# Altium PCB Sync_Buck_DC-DC_24V_PCB.PcbDoc
Units mil, origin at the board's own origin, x right, y up, seen from the top; angles counter-clockwise.
Board outline 2800 x 2100 mil, 4 copper layers (Top Layer, GND, PWR, Bottom Layer), stack 23.712 mil thick; 47 components, 25 nets, 124 pads, 41 vias.
Unrouted connection lines stored in the file: 1.
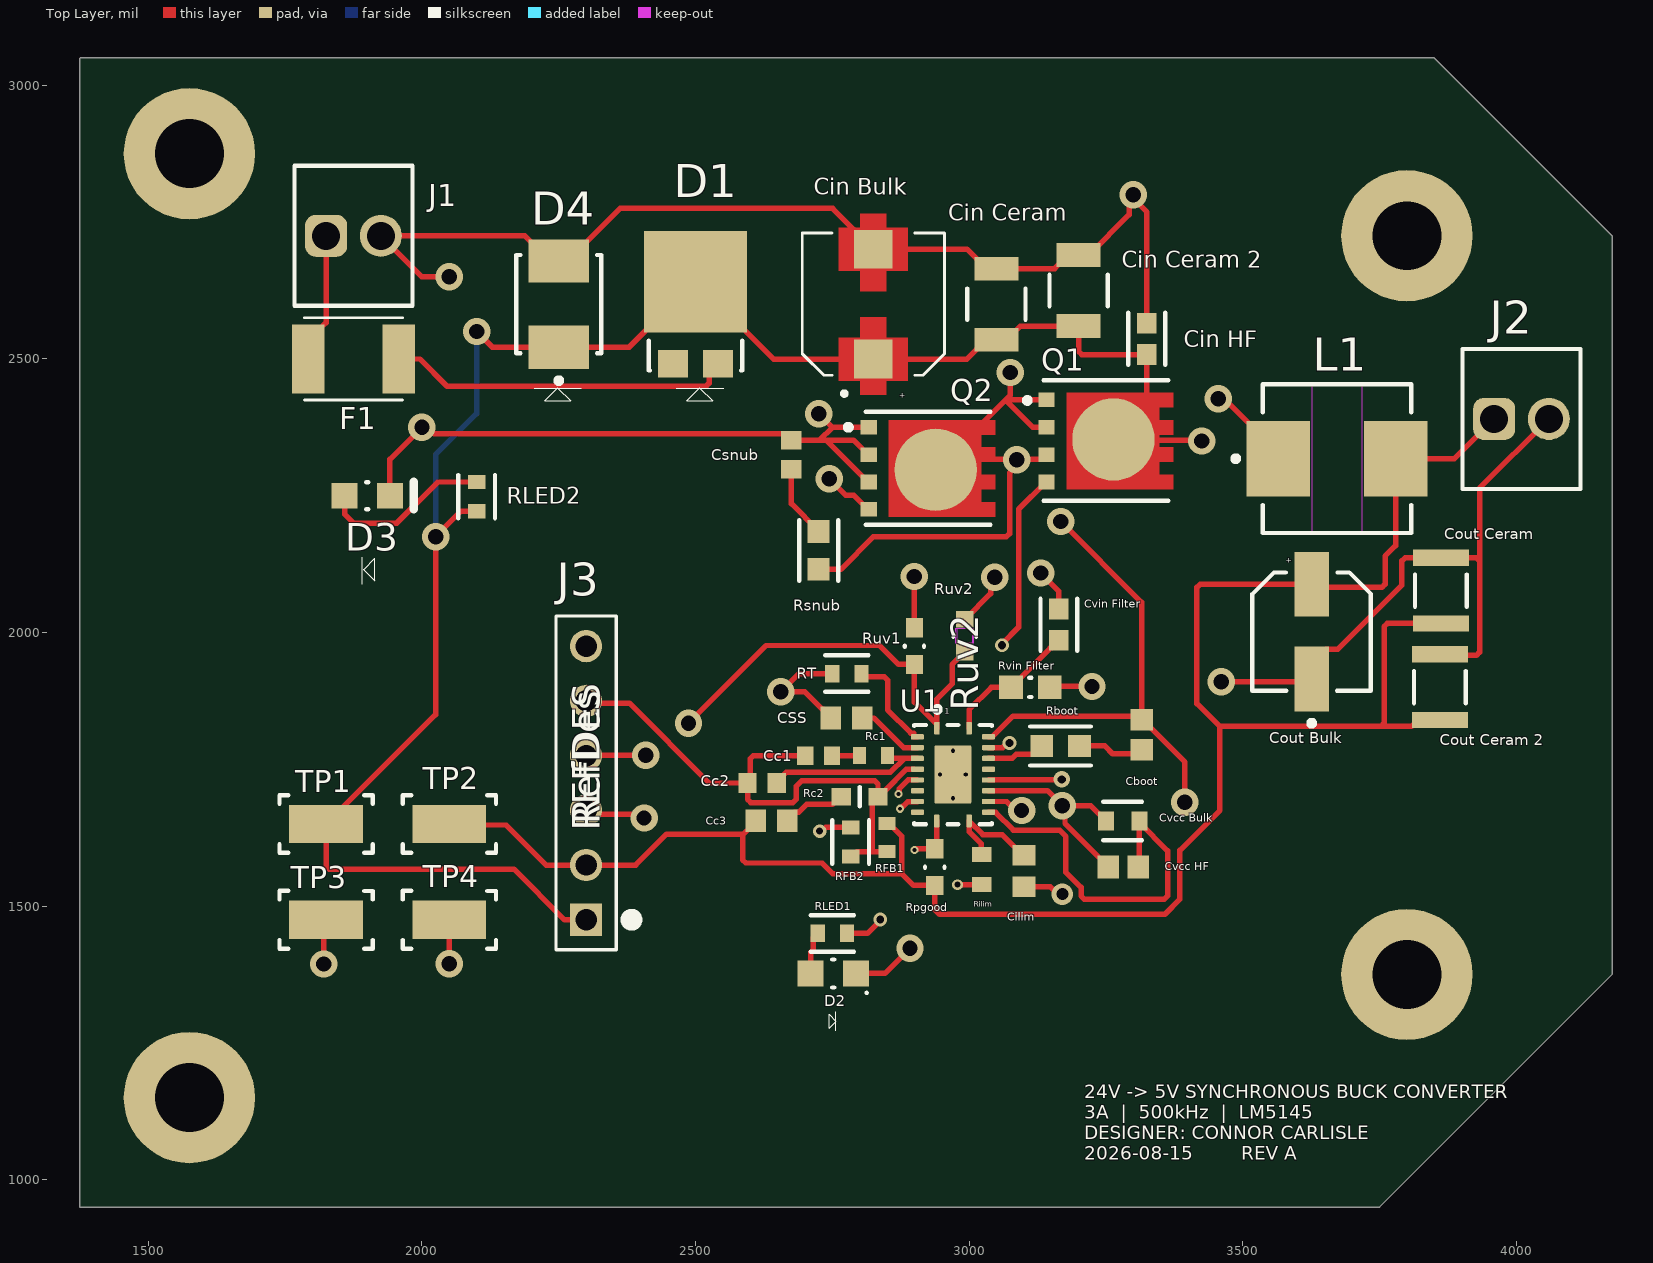
[diagram p0: Top Layer view]
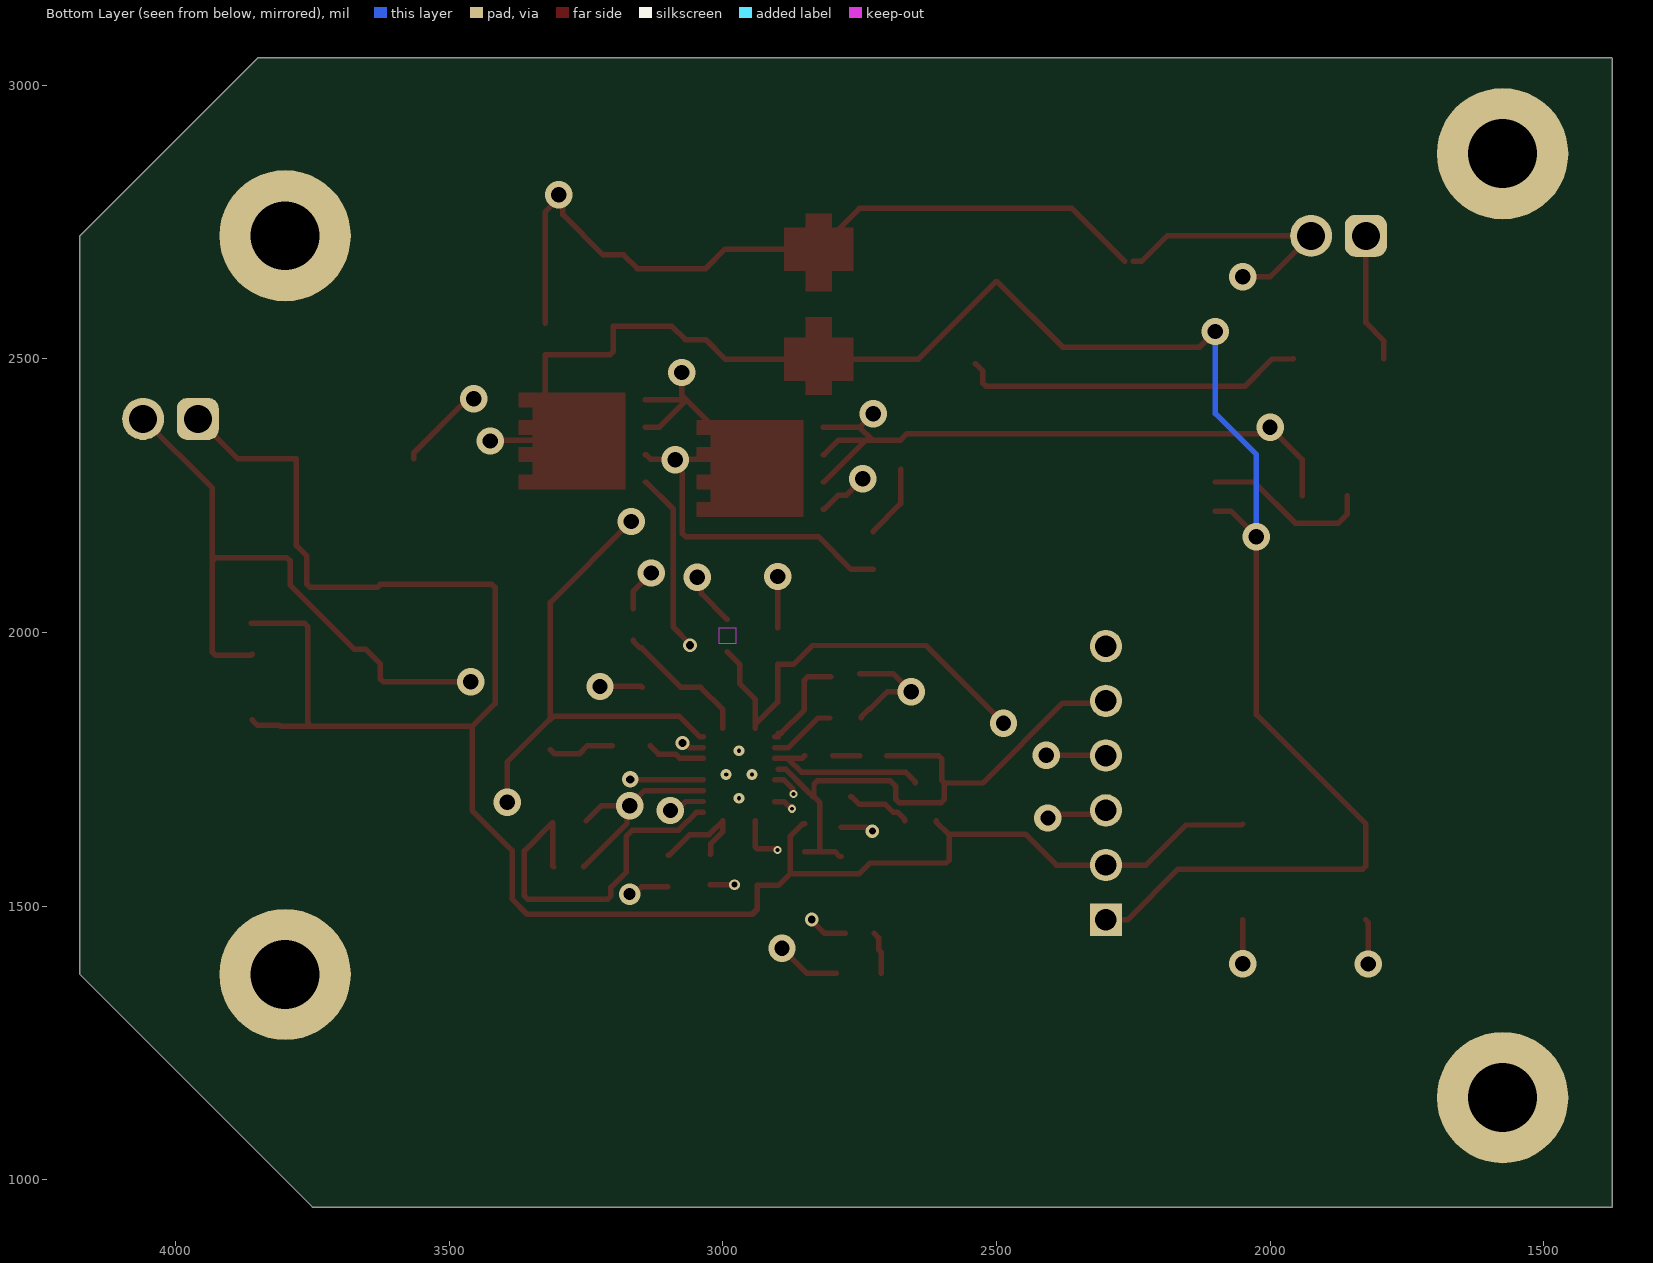
[diagram p1: Bottom Layer view, seen from below]
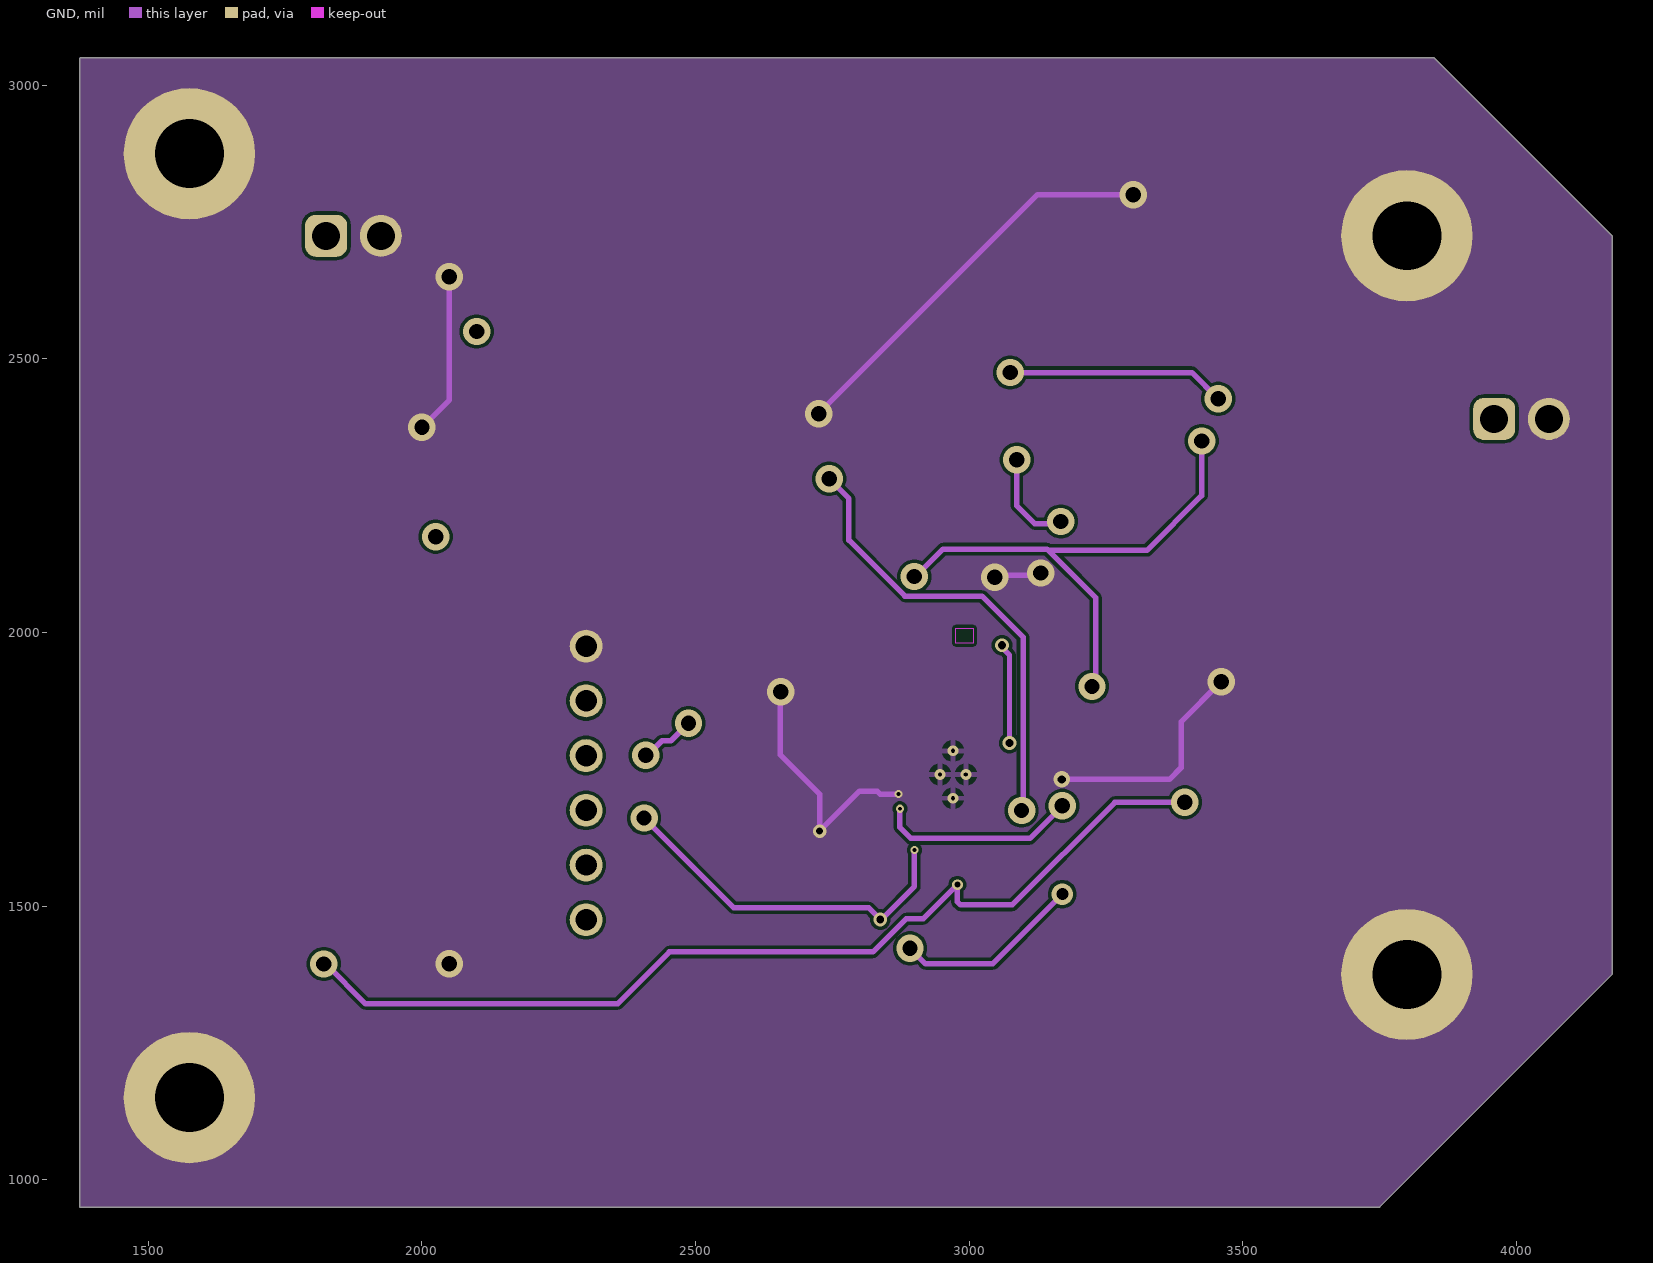
[diagram p2: GND]
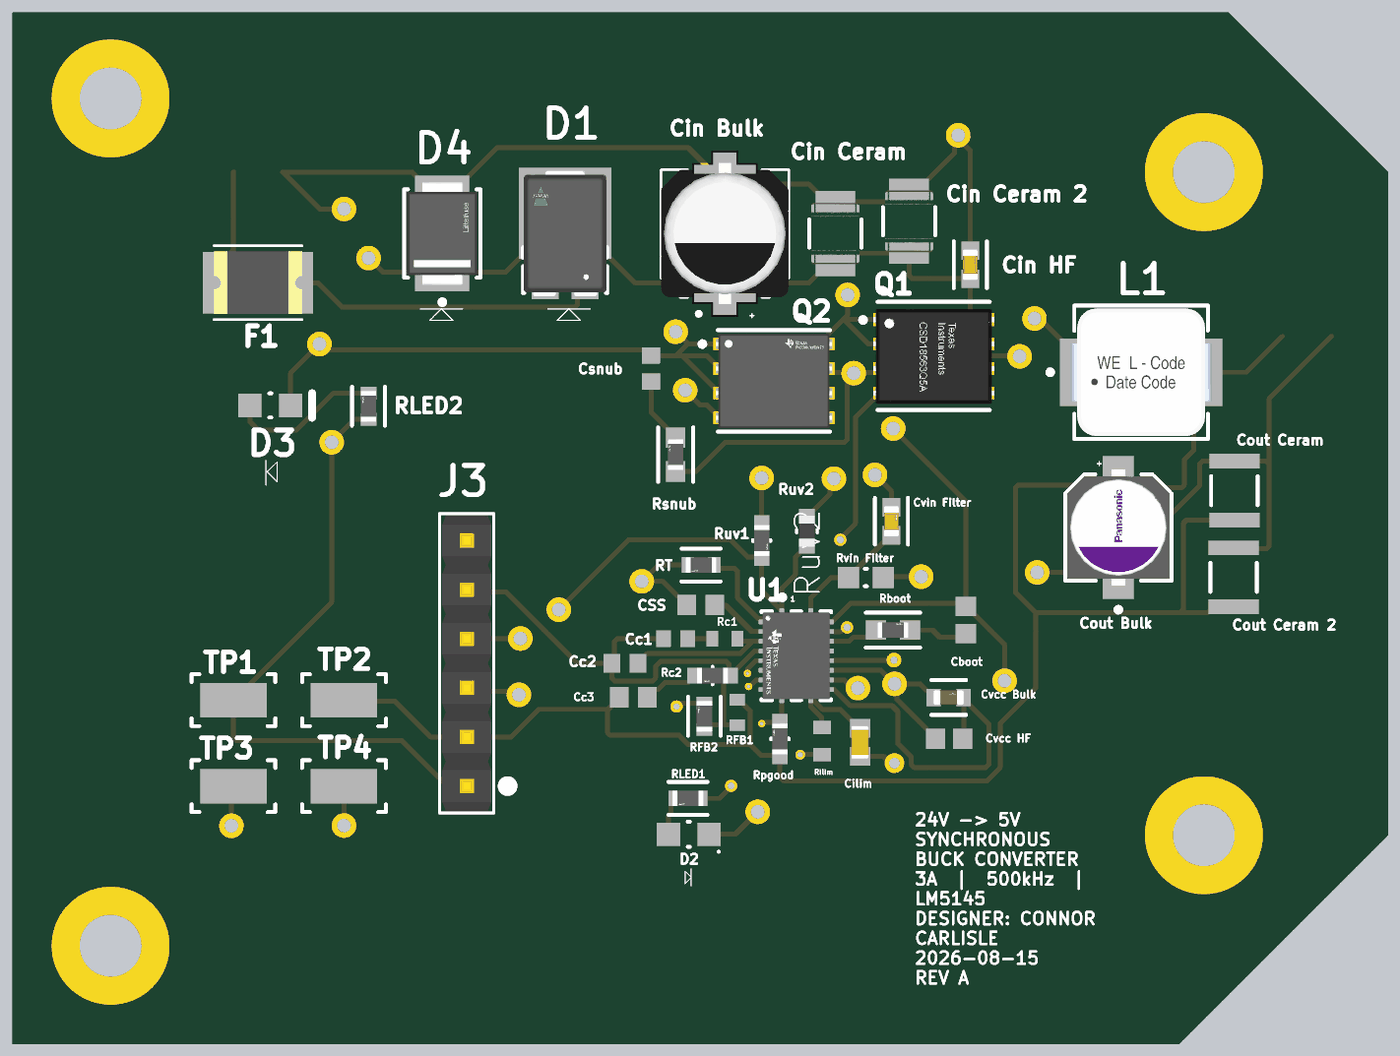
[diagram p3: 3D render of the assembled board from above, using the file's embedded part models]

## Layer stack, top to bottom
Top Solder: solder mask 0.4, Solder Resist, Dk 3.5
Top Layer: signal copper 1.378
Dielectric 1: prepreg 2.8, PP-006, Dk 4.1
GND: signal copper 1.378
Dielectric 2: dielectric 12.6, FR-4, Dk 4.8
PWR: signal copper 1.378
Dielectric 3: prepreg 2.8, PP-006, Dk 4.1
Bottom Layer: signal copper 1.378
Bottom Solder: solder mask 0.4, Solder Resist, Dk 3.5

## Board outline
1375,950 1375,3049.41 1375.59,3050 3850,3050 4175,2725 4175,1375 3750,950

## Design rules (kind name [scope] priority, off if disabled: settings)
Clearance [All] p1: gap=5.91 ignorepadtopadclearanceinfootprint=FALSE
MinimumSolderMaskSliver [All] p1: minsoldermaskwidth=4
PlaneConnect [All] p1: planeconnectstyle=Direct reliefexpansion=20 reliefentries=4 reliefconductorwidth=10 reliefairgap=10
PolygonConnect PolygonConnect_Thermal [InComponent('Q1') OR InComponent('Q2') OR InComponent('L1') OR InComponent('U1')] p1: thpad.connectstyle=Direct thpad.reliefconductorwidth=10 thpad.reliefentries=4 thpad.polygonreliefangle="90 Angle" thpad.airgapwidth=10 smdpad.connectstyle=NoConnect smdpad.reliefconductorwidth=10 smdpad.reliefentries=4 smdpad.polygonreliefangle="90 Angle" smdpad.airgapwidth=10 via.connectstyle=Relief via.reliefconductorwidth=10 via.reliefentries=4 via.polygonreliefangle="90 Angle" via.airgapwidth=10
PolygonConnect [All] p2: connectstyle=Direct reliefconductorwidth=12 reliefentries=4 polygonreliefangle="90 Angle" airgapwidth=10
RoutingVias [All] p1: holewidth=28 width=50 viastyle="Through Hole" minholewidth=28 minwidth=50 maxholewidth=28 maxwidth=50
ShortCircuit [All] p1: allowed=TRUE
SilkToSilkClearance [All] p1: silktosilkclearance=4
SilkToSolderMaskClearance [IsPad] p1: minsilkscreentomaskgap=4 clearancetoexposedcopper=TRUE
SolderMaskExpansion [All] p1: expansion=0 istentingtop=FALSE
SupplyNets "Schematic Supply Nets" [InNet('PGND')] p1: voltage=0.000
Width Width_Power [InNetClass('POWERNETS')] p1: maxlimit=100 minlimit=15 preferedwidth=40
Width [All] p2: maxlimit=20 minlimit=6 preferedwidth=10
25 further rules are at their usual default settings.

## Classes and differential pairs
component class Power_Stage: "Cin Bulk" "Cin Ceram" "Cin Ceram 2" "Cin HF" "Cout Bulk" "Cout Ceram" "Cout Ceram 2" Csnub J2 L1 Q1 Q2 Rsnub
component class Input_Protection: D1 D3 D4 F1 J1 RLED2
component class Controller: Cboot Cc1 Cc2 Cc3 Cilim CSS "Cvcc Bulk" "Cvcc HF" "Cvin Filter" D2 J3 Rboot Rc1 Rc2 RFB1 RFB2 Rilim RLED1 Rpgood RT Ruv1 Ruv2 "Rvin Filter" TP1 TP2 TP3 TP4 U1

## Components (designator, comment, footprint, x,y, rotation, side; value= is the part's Value field where it differs from the comment)
Cboot "GRM188R71C104KA01D" MURA-0603_H_0.9_M 3315.45,1813.31 r90 top
Cc1 "GRM188R71H332KA01D" CAPC1608X90X35LL10T15 2725,1775 r180 top
Cc2 "GRM1885C1H560JA01D" CAPC1608X90X35NL10T15 2621.71,1724.91 r180 top
Cc3 "GRM1885C1H681JA01D" CAPC1608X90X35ML10T15 2638.91,1655.96 r180 top
Cilim "GRM1885C1H220JA01D" CAPC1608X90X35ML10T15 3100.27,1564.18 r270 top
"Cin Bulk" "EEHZA1H220V" CAP_EEHZA1H220V 2825,2600 r90 top value=22µF
"Cin Ceram" "GRM32ER71H475KA88L" FP-GRM32-MFG 3050,2600 r90 top value=4.7uF
"Cin Ceram 2" "GRM32ER71H475KA88L" FP-GRM32-MFG 3200,2625 r90 top value=4.7uF
"Cin HF" "GRM188R72A104KA35D" FP-GRM188-0_1-e0_2_0_5-IPC_B 3324.63,2536.56 r90 top
"Cout Bulk" "16SVPG47M" FP-OS-CON-SMT-B45-MFG 3625.97,2001.51 r90 top
"Cout Ceram" "GRM32ER71C226KE18L" CAPC3225X270X30LL30 3862.15,2076.49 r90 top
"Cout Ceram 2" "GRM32ER71C226KE18L" CAPC3225X270X30LL30 3860.43,1900.14 r90 top
Csnub "(DNP)" CAPC1608X90X35NL10T15 2675,2325 r90 top
CSS "GRM188R71C473KA01D" CAPC1608X90X35ML10T15 2776.08,1843.7 r180 top
"Cvcc Bulk" "GRM188Z71C225KE43D" FP-GRM188-0_2-MFG 3280.57,1655.51 r0 top
"Cvcc HF" "GRM188R71C104KA01D" MURA-0603_H_0.9_M 3281.66,1571.44 r0 top
"Cvin Filter" "GRM188R72A104KA35D" FP-GRM188-0_1-e0_2_0_5-IPC_B 3164.11,2014.29 r90 top
D1 "SS5P10-M3/86A" FP-95570-MFG 2500,2600 r0 top
D2 "LTST-C170KGKT" LTST-LTST-C170KGKT-2_V 2751.71,1376.93 r180 top
D3 "LTST-C170KRKT" LTST-C170KRKT_V 1900,2250 r0 top
D4 "SMBJ30A" FP-DO-214AA_SMB_J-Bend-MFG 2250,2600 r90 top
F1 "MF-MSMF150/24X-2" FUSER_MF-MSMF150/24X-2 1875,2500 r0 top
J1 "691210910002" 691210910002 51875,52725 r0 top
J2 "691210910002" 691210910002 54009.57,52390.27 r0 top
J3 "PRPC006SAAN-RC" CONN6_PRPC006SAAN-RC_SUL 2300,1475 r90 top
L1 "74437349100" WE-LHMI_7050 3672.23,2317.58 r0 top
Q1 "CSD18563Q5A" FP-DQJ0008A-MFG#1 3250,2350 r0 top
Q2 "CSD18531Q5AT" FP-DQJ0008A-MFG#2 2925,2300 r0 top
Rboot "RC0603FR-072R2L" FP-RC0603-0_55-IPC_A 3167.19,1792.62 r0 top
Rc1 "RC0603FR-0715KL" RESC1608X55X25LL10T15 2825,1775 r180 top
Rc2 "RC0603FR-07100RL" FP-RC0603-0_55-MFG 2800,1700 r180 top
RFB1 "RC0603FR-0752K3L" RESC1608X55X25LL10T15 2850,1625 r270 top
RFB2 "RC0603FR-0710KL" FP-RC0603-0_55-IPC_C 2783.45,1617.23 r90 top
Rilim "RC0603FR-07147RL" RESC1608X55X25NL10T15 3023.03,1566.88 r270 top
RLED1 "RC0603FR-071KL" FP-RC0603-0_55-IPC_C 2750,1450 r180 top
RLED2 "RC0603FR-0710KL" FP-RC0603-0_55-IPC_C 2100,2248.36 r90 top
Rpgood "RC0603FR-07100KL" FP-RC0603-0_55-MFG 2937.19,1571.11 r90 top
Rsnub "(DNP)" FP-RC0603-0_55-IPC_A 2725,2150 r90 top
RT "RC0603FR-0720KL" FP-RC0603-0_55-IPC_C 2776.64,1925 r180 top
Ruv1 "RC0603FR-07100KL" FP-RC0603-0_55-MFG 2900,1975 r270 top
Ruv2 "RC0603FR-0717K8L" RC0603N_YAG 2991.97,1994.03 r90 top
"Rvin Filter" "4R7 1% 0603(1608)" RESC0603(1608)_M 3112,1899.81 r180 top value="4.70 Ohm"
TP1 "5015" FP-5015-MFG 1825,1650 r0 top
TP2 "5015" FP-5015-MFG 2050,1650 r0 top
TP3 "5015" FP-5015-MFG 1825,1475 r0 top
TP4 "5015" FP-5015-MFG 2050,1475 r0 top
U1 "LM5145RGYR" FP-RGY0020B-MFG 2970.47,1740.35 r0 top

## Footprints (in the part's own frame and the unit in brackets; to place one, negate y for a bottom-side part, rotate by r counter-clockwise, add the part's x,y. Pads: shape width x height; smd on the part's side, far side on the other; paste and mask are expansions set on the pad)
691210910002 [mm] "2,54mm - modular - green - Horizontal wire entry - Cage clamp - 0,8mm2 wires - 02p"
  rrect50% 1.95x1.95 hole 1.3: 1(-1271.27,-1270)
  round 1.95 hole 1.3: 2(-1268.73,-1270)
  silkscreen extent -1272.74,-1273.25 -1267.26,-1266.75, body extent -1272.74,-1273.25 -1267.26,-1266.75, height 8.55
CAP_EEHZA1H220V [mm]
  rect 1.8x1.8 smd paste-2 mask+0: 1(-2.55,0) 2(2.55,0)
  Top Layer region: 3.55,0.6 4.2,0.6 4.2,-0.6 3.55,-0.6 3.55,-1.6 1.55,-1.6 1.55,-0.6 0.6,-0.6 0.6,0.6 1.55,0.6 1.55,1.6 3.55,1.6
  Top Layer region: -1.55,0.6 -0.6,0.6 -0.6,-0.6 -1.55,-0.6 -1.55,-1.6 -3.55,-1.6 -3.55,-0.6 -4.2,-0.6 -4.2,0.6 -3.55,0.6 -3.55,1.6 -1.55,1.6
  silkscreen extent -4.25,-3.3 3.3,3.3, body extent -3.65,-3.3 3.65,3.3, height 6.1
CAPC1608X90X35LL10T15 [mm] "Chip Capacitor, 2-Leads, Body 1.60x0.80mm, IPC High Density"
  rect 0.75x0.85 smd: 1(-0.625,0) 2(0.625,0)
  body extent -0.85,-0.45 0.85,0.45, height 0.9
CAPC1608X90X35ML10T15 [mm] "Chip Capacitor, 2-Leads, Body 1.60x0.80mm, IPC Low Density"
  rect 0.95x1.05 smd: 1(-0.725,0) 2(0.725,0)
  body extent -0.85,-0.45 0.85,0.45, height 0.9
CAPC1608X90X35NL10T15 [mm] "Chip Capacitor, 2-Leads, Body 1.60x0.80mm, IPC Medium Density"
  rect 0.85x0.95 smd: 1(-0.675,0) 2(0.675,0)
  body extent -0.85,-0.45 0.85,0.45, height 0.9
CAPC3225X270X30LL30 [mm] "Chip Capacitor, 2-Leads, Body 3.5x2.7mm, IPC High Density"
  rect 0.75x2.6 smd: 1(-1.525,0) 2(1.525,0)
  silkscreen extent -0.75,-1.2 0.75,1.2, body extent -1.75,-1.35 1.75,1.35, height 2.7
CONN6_PRPC006SAAN-RC_SUL [mil]
  rect 59x59 / inner round 60 / far side rect 59x59 hole 39 paste-99999 mask+0: 1(0,0)
  round 59 / inner round 60 / far side round 59 hole 39 paste-99999 mask+0: 2(100,0) 3(200,0) 4(300,0) 5(400,0) 6(500,0)
  silkscreen extent -55,-93 555,55, body extent -50,-50 550,50, height 328
FP-5015-MFG [mm]
  rect 3.43x1.78 smd paste+0 mask+0: 1(0,0)
  silkscreen extent -2.16,-1.34 2.17,1.34
FP-95570-MFG [mm]
  rect 1.4x1.27 smd paste+0 mask+0: 1(1.04,-2.765) 2(-1.04,-2.765)
  rect 4.8x4.72 smd paste+0 mask+0: 3(0,1.04)
  silkscreen extent -2.17,-3.08 2.17,-1.7, body extent -2.5,-3.5 2.5,3.5, height 0.25
FP-DO-214AA_SMB_J-Bend-MFG [mm]
  rect 2x2.8 smd paste+0 mask+0: 1(-2,0) 2(2,0)
  silkscreen extent -3.67,-1.97 2.28,1.97, body extent -3.1,-2.07 3.1,2.07, height 0.25
FP-DQJ0008A-MFG#1 [mm]
  rect 0.75x0.675 smd paste-1000 mask+0: 1(-2.752,1.905) 2(-2.752,0.635) 3(-2.752,-0.635) 4(-2.752,-1.905)
  round 3.821 smd paste-1000 mask+0: 5-6-7-8(0.35,0.07)
  Top Layer region: -1.823,2.242 3.127,2.242 3.127,1.568 2.472,1.568 2.472,0.972 3.127,0.972 3.127,0.298 2.472,0.298 2.472,-0.298 3.127,-0.298 3.127,-0.972 2.472,-0.972 2.472,-1.568 3.127,-1.568 3.127,-2.242 -1.823,-2.242 -1.823,2.242
  silkscreen extent -3.77,-2.78 2.9,2.82, body extent -3.23,-2.6 3.23,2.6, height 0.25
FP-DQJ0008A-MFG#2 [mm]
  rect 0.75x0.675 smd paste-1000 mask+0: 1(-2.752,1.905) 2(-2.752,0.635) 3(-2.752,-0.635) 4(-2.752,-1.905)
  round 3.821 smd paste-1000 mask+0: 5-6-7-8(0.35,-0.07)
  Top Layer region: 3.127,-2.242 3.127,-1.568 2.472,-1.568 2.472,-0.972 3.127,-0.972 3.127,-0.297 2.472,-0.297 2.472,0.298 3.127,0.298 3.127,0.973 2.472,0.973 2.472,1.568 3.127,1.568 3.127,2.243 -1.823,2.242 -1.823,-2.242
  silkscreen extent -3.82,-2.63 2.9,2.63, body extent -3.23,-2.6 3.23,2.6, height 0.25
FP-GRM32-MFG [mm]
  rect 1.1x2.05 smd paste+0 mask+0: 1(-1.65,0) 2(1.65,0)
  silkscreen extent -0.72,-1.35 0.72,1.35, body extent -2.3,-1.45 2.3,1.45, height 0.25
FP-GRM188-0_1-e0_2_0_5-IPC_B [mil]
  rect 37.74x35.91 smd paste+0 mask+0: 1(-28.61,0) 2(28.61,0)
  silkscreen extent -47,-34 47,34, body extent -57,-28 57,28, height 10
FP-GRM188-0_2-MFG [mm]
  rect 0.75x0.9 smd paste+0 mask+0: 1(-0.775,0) 2(0.775,0)
  silkscreen extent -0.9,-0.9 0.9,0.9, body extent -1.25,-0.6 1.25,0.6, height 0.25
FP-OS-CON-SMT-B45-MFG [mm]
  rect 3x1.6 smd paste+0 mask+0: 1(-2.2,0) 2(2.2,0)
  silkscreen extent -4.37,-2.75 2.75,2.75, body extent -3.95,-3 3.95,3, height 0.25
FP-RC0603-0_55-IPC_A [mil]
  rect 41.68x39.85 smd paste+0 mask+0: 1(-34.52,0) 2(34.52,0)
  silkscreen extent -55,-36 55,36, body extent -75,-40 75,40, height 10
FP-RC0603-0_55-IPC_C [mil]
  rect 25.93x31.97 smd paste+0 mask+0: 1(-26.64,0) 2(26.64,0)
  silkscreen extent -40,-33 40,33, body extent -44,-22 44,22, height 10
FP-RC0603-0_55-MFG [mm]
  rect 0.9x0.8 smd paste+0 mask+0: 1(-0.85,0) 2(0.85,0)
  silkscreen extent 0,-0.45 0,0.45, body extent -1.4,-0.55 1.4,0.55, height 0.25
FP-RGY0020B-MFG [mm]
  rrect40% 0.25x0.6 smd paste+0 mask+0: 1(-0.75,2.15) 10(-0.75,-2.15) 11(0.75,-2.15) 20(0.75,2.15)
  rrect40% 0.6x0.25 smd paste+0 mask+0: 2(-1.65,1.75) 3(-1.65,1.25) 4(-1.65,0.75) 5(-1.65,0.25) 6(-1.65,-0.25) 7(-1.65,-0.75) 8(-1.65,-1.25) 9(-1.65,-1.75) 12(1.65,-1.75) 13(1.65,-1.25) 14(1.65,-0.75) 15(1.65,-0.25) 16(1.65,0.25) 17(1.65,0.75) 18(1.65,1.25) 19(1.65,1.75)
  rrect6% 1.7x2.7 smd paste-1000 mask+0: 21(0,0)
  silkscreen extent -1.8,-2.3 1.8,3.15, body extent -2.05,-2.55 2.05,2.55, height 0.25
FUSER_MF-MSMF150/24X-2 [mm]
  rect 1.5x3.2 smd: 1(-2.1,0) 2(2.1,0)
  silkscreen extent -2.27,-1.91 2.27,1.91, body extent -2.27,-1.62 2.27,1.62, height 0.85
LTST-C170KRKT_V [mm] "SMD, 2-Leads, Body 2x1.25mm"
  rect 1.2x1.2 smd: 1(-1.05,0) 2(1.05,0)
  silkscreen extent -0.05,-0.64 2.16,0.64, body extent -1,-0.63 1,0.63, height 1.2
LTST-LTST-C170KGKT-2_V [mm] "SMD, 2-Leads, Body 2.00x1.25mm"
  rect 1.2x1.2 smd: 1(-1.05,0) 2(1.05,0)
  silkscreen extent -1.6,-0.65 0.05,0.95, body extent -1,-0.63 1,0.63, height 1.1
MURA-0603_H_0.9_M [mm] "SMD, 2-Leads, Body 1.7x0.9mm, IPC Low Density"
  rect 1x1.05 smd: 1(-0.7,0) 2(0.7,0)
  body extent -0.85,-0.45 0.85,0.45, height 0.9
RC0603N_YAG [mil]
  rect 30x32 smd paste+0 mask+0: 1(-30.5,0) 2(30.5,0)
  Top Layer keep-out region: -13.5,-14 -13.5,14 13.5,14 13.5,-14
  Keep-Out Layer region: -13.5,-16 -13.5,16 13.5,16 13.5,-16
  silkscreen extent -3,-21 3,21, body extent -31,-16 31,16, height 28
RESC0603(1608)_M [mm] "Chip Resistor, Body 1.6x0.8mm, IPC Low Density"
  rect 1.1x1.1 smd: 1(-0.9,0) 2(0.9,0)
  silkscreen extent -0.05,-0.45 0.05,0.45, body extent -0.85,-0.47 0.85,0.47, height 0.6
RESC1608X55X25LL10T15 [mm] "Chip Resistor, 2-Leads, Body 1.70x0.90mm, IPC High Density"
  rect 0.6x0.8 smd: 1(-0.65,0) 2(0.65,0)
  body extent -0.85,-0.45 0.85,0.45, height 0.55
RESC1608X55X25NL10T15 [mm] "Chip Resistor, 2-Leads, Body 1.60x0.80mm, IPC Medium Density"
  rect 0.7x0.9 smd: 1(-0.7,0) 2(0.7,0)
  body extent -0.85,-0.45 0.85,0.45, height 0.55
WE-LHMI_7050 [mm] "SMT Power Inductor, 2-Leads, body 6.6x6.6mm"
  rect 2.95x3.5 smd: 1(-2.725,0) 2(2.725,0)
  Top Layer keep-out region: -1.15,3.45 1.15,3.45 1.15,-3.45 -1.15,-3.45
  silkscreen extent -4.82,-3.45 3.45,3.45, body extent -3.65,-3.3 3.65,3.3, height 4.8

## Part data
Cboot "Cvcc HF": library part CMP-2000-05253-1, "CAP, Ceramic, 0.1 uF, 10%, 16 V, 0603, RoHS, Tape and Reel", Capacitance=0.1uF, Capacitance - nF=100nF, Capacitance - pF=100000pF, Case Code - in=0603, Case Code - mm=1608, Case Height=0.8mm, Case Length=1.6mm, Dielectric=X7R, Manufacturer=Murata, Maximum Operating Temperature=+125C, Minimum Operating Temperature=-55C, Operating Temperature Range=-55Cto+125C, Package / Case=0603(1608metric), Temperature Coefficient / Code=+/-15%, Tolerance=10%, Voltage Rating=16V, Brand=MurataElectronics, Case Width=0.8mm, Datasheet URL=https://datasheet.ciiva.com/29202/451467-da-01-en-vs-kondensator-0603-29202287.pdf, Datasheet Version=Dec-10, Dimensions=0.8mmWx1.6mmLx0.8mmH, Factory Pack Quantity=4000, Manufacturer URL=http://www.murata.com/, Packaging=Reel, Product=GeneralTypeMLCCs, Product Category=MultilayerCeramicCapacitorsMLCC-SMD/SMT, RoHS=Details, Series=GRM, Termination Style=SMD/SMT, Type=GeneralPurposeMLCC, Voltage Rating DC=16V
Cc1: library part CMP-2006-02916-1, Manufacturer=Murata, Part Number=GRM188R71H332KA01D
Cc2: library part CMP-2006-02680-1, Manufacturer=Murata, Part Number=GRM1885C1H560JA01D
Cc3: library part CMP-2006-02690-1, Manufacturer=Murata, Part Number=GRM1885C1H681JA01D
Cilim: library part CMP-2000-04945-1, "Chip Capacitor, 22 pF, +/- 5%, 50 V, -55 to 125 degC, 0603 (1608 Metric), RoHS, Tape and Reel", Capacitance=22pF, Case Size/Dimension=0603, Dielectric=C0G, Manufacturer=Murata, Package Description="2-Pin Surface Mount Device, Body 1.6 x 0.8 mm", Package Reference=603, Rated Voltage=50V, Tolerance (%)=±5%, Datasheet URL=https://datasheet.ciiva.com/11786/0900766b807a1cab-11786398.pdf, Datasheet Version=Jul-06, Manufacturer URL=http://www.murata.com/
"Cin Bulk": library part CMP-001-00083-1, "Cap Aluminum Polymer Hybrid 22uF 50VDC 20% (6.3 X 6.1mm) SMD 0.08 Ohm 1100mA 10000h 105C Automotive T/R", Case/Package="RADIAL-2 Panasonic", Check_prices=https://www.snapeda.com/parts/EEHZA1H220V/Panasonic/view-part/?ref=eda, Component Type=Standard, Design Item ID=EEHZA1H220V, MF=Panasonic, MP=EEHZA1H220V, Pins=2, SnapEDA_Link=https://www.snapeda.com/parts/EEHZA1H220V/Panasonic/view-part/?ref=snap, Source=EEHZA1H220V.SchLib
"Cin Ceram" "Cin Ceram 2": library part CMP-1038-02162-3, "CAP CER 4.7UF 50V X7R 1210", Capacitance=4.7uF, Manufacturer=Murata, Package=GRM32, Temperature="-55°C to +125°C", Temperature Characteristic=X7R, Temperature Coefficient=15%, Temperature Range High=+125°C, Temperature Range Low=-55°C, Tolerance=10%, Voltage Rating=50V, Automotive=No, Category=Cap, ComponentLink2Description=Datasheet, ComponentLink2URL=https://search.murata.co.jp/Ceramy/image/img/A01X/G101/ENG/GRM32ER71H475KA88-01A.pdf, Device Class L1="Passive Components", Device Class L2=Capacitors, Device Class L3="Ceramic Capacitors", Digikey Description="CAP CER 4.7UF 50V X7R 1210", Height=2.7mm, Lead Free=Yes, Manufacturer Part Number=GRM32ER71H475KA88L, Material=Ceramic, Mouser Description="Capacitor Capacitance tolerance: ±10% Ceramic type: X7R Construction form: 1210 Capacitance: 4.7 µF Rated voltage: 50...", Octopart=https://octopart.com/grm32er71h475ka88l-murata-196576, RoHS=TRUE
"Cin HF" "Cvin Filter": library part CMP-1035-02595-8, "Chip Multilayer Ceramic Capacitors for General Purpose, 0603, 0.10uF, X7R, 15%, 10%, 100V", Capacitance=100nF, Case Code (Imperial)=0603, Case Code (Metric)=1608, Dielectric=X7R, Max Operating Temperature=125°C, Min Operating Temperature=-55°C, Package Quantity=1, Tolerance=10%, Voltage=100V, Case/Package=0603, Depth=0.8mm, Height=0.8mm, Lead Free="Lead Free", Length=1.6mm, Material=Ceramic, Mount="Surface Mount", Packaging="Tape and Reel", Radiation Hardening=No, REACH SVHC="No SVHC", Termination=SMD/SMT, Thickness=0.035inch, Voltage Rating=100V, Voltage Rating (DC)=100V, Weight=0.000222oz, Width=0.8mm
"Cout Bulk": library part CMP-05428-000223-1, "CAP ALUM POLY 47UF 20% 16V SMD", Capacitance=47uF, Case/Package=Radial, ESR (Equivalent Series Resistance)=25mR, Max Operating Temperature=105°C, Min Operating Temperature=-55°C, Package Quantity=2500, Ripple Current=3.2A, Tolerance=20%, Voltage Rating=16V, Height - Seated (Max)=0.177inch, Life (Hours)=5000Hour, Mount="Surface Mount", Packaging="Cut Tape", Polarity=Polar, REACH SVHC="No SVHC", RoHS Compliant=Yes, Series="OS-CON™, SVPG", Voltage Rating (DC)=16V
"Cout Ceram" "Cout Ceram 2": library part CMP-2000-06364-1, "Chip Capacitor, 22 uF, +/- 10%, 16 V, -55 to 125 degC, 1210 (3225 Metric), RoHS, Tape and Reel", Capacitance=22000000pF, Case Size/Dimension=1210, Dielectric=X7R, Manufacturer=Murata, Package Description="2-Pin Surface Mount Device, Body 3.2 x 2.5 mm", Rated Voltage=16V, Tolerance (%)=±10%, Datasheet URL=http://media.digikey.com/pdf/Data%20Sheets/Murata%20PDFs/grm32er71c226ke18.pdf, Datasheet Version=11/2010, Manufacturer URL=http://www.murata.com/, Mounting Technology=SurfaceMount, Package Reference=1210
Csnub: library part CMP-2006-02891-1, Manufacturer=Murata, Part Number=GRM188R71H102KA01D
CSS: library part CMP-2006-02858-1, Manufacturer=Murata, Part Number=GRM188R71C473KA01D
"Cvcc Bulk": library part CMP-06035-057307-1, "Chip Multilayer Ceramic Capacitors for General Purpose, 0603, 2.2uF, X7R, 15%, 10%, 16V", Case/Package=0603
D1: library part CMP-02539-000057-1, "DIODE SCHOTTKY 100V 5A TO277A", Average Rectified Current=5A, Case/Package=TO-277A, Forward Voltage=880mV, Max Forward Surge Current (Ifsm)=150A, Max Operating Temperature=150°C, Max Repetitive Reverse Voltage (Vrrm)=100V, Max Reverse Current=15uA, Min Operating Temperature=-55°C, Package Quantity=1500, Element Configuration="Common Cathode", Forward Current=5A, Height=0.031inch, Lead Free="Lead Free", Length=0.242inch, Max Reverse Leakage Current=15uA, Max Reverse Voltage (DC)=100V, Max Surge Current=150A, Mount="Surface Mount", Number of Pins=3, Packaging="Tape and Reel", Peak Non-Repetitive Surge Current=150A, Radiation Hardening=No, RoHS Compliant=Yes, Series=eSMP®, Width=0.171inch
D2: library part CMP-2000-06620-1, "Ultra Bright AlInGaP Chip LED, 75 mW, -55 to 85 degC, 2-Pin SMD (0805), RoHS, Tape and Reel", Emitting Color=YellowGreen, Forward Current=30mA, Forward Voltage=2.4V, Manufacturer=Lite-On, Operating Temp Range=-55Cto85C, Operating Temperature Classification=Industrial, Package Description="2-Pin Surface Mounted Device, Body 2 x 1.25 mm", Package Reference=LTST-C170KGKT-2, Package Type=ChipLed, Power Dissipation=75W, Power Dissipation Max=75mW, Reverse Voltage=5V, Test Current (It)=20mA, Chip Material=AlGaInP, Datasheet URL=http://optoelectronics.liteon.com/upload/download/DS22-2000-073/S_110_LTST-C170KGKT.pdf, Datasheet Version="Rev. G, 06/2005", DELETED=Compliant, Dominant Wave Length=571nm, Forward Current Max=30mA, High Brightness=Yes, Lens Dimensions=1.4x1.25x0.6mm, Lum Intensity=35mcd, Luminous Intensity=35mcd, Main Category=ChipLED, Manufacturer URL=http://www.us.liteon.com/, Mounting=SurfaceMount, Mounting Technology=SurfaceMount, Number of  Elements=1, Packaging=TapeandReel, Peak Wavelength=574nm, Pin Count=2, Product Depth (mm)=1.25mm, Product Height (mm)=1.1mm, Product Length (mm)=2mm, Rad Hardened=No, Shape Type=Rectangular, Type=Uni-Color, Viewing Angle=130deg
D3: library part CMP-2000-07593-1, "LED Red, 75 mW, 54 mcd, -55 to 85 degC, 2-Pin SMD, RoHS, Tape and Reel", Case Code (Imperial)=0805, Case Code (Metric)=2012, Colour=Red, Forward Current=30mA, Forward Voltage=2V, Lens Colour=Colorless, Manufacturer=Lite-On, Max Operating Temperature=85degC, Min Operating Temperature=-55degC, Package Description="2-Pin Surface Mount Device, Body 2 x 1.25 mm", Package Quantity=1, Package Reference=C170KRKT, Power Dissipation=75mW, Test Current=20mA, Case\/Package=0805, Datasheet URL=http://optoelectronics.liteon.com/upload/download/DS-22-99-0150/LTST-C170KRKT.pdf, Datasheet Version="Rev. D, 11/2014", Depth=1.6mm, Dominant Wavelength=631nm, Height=1.1mm, Illumination Colour=Red, Lead Free=LeadFree, Length=3.2mm, Lens Style=Rectangular, Lens Transparency=Clear, Luminous Intensity=54mcd, Manufacturer URL=http://www.us.liteon.com/, Mount=SurfaceMount, Mounting Technology=SurfaceMount, Number of Elements=1, Number of LEDs=1, Number of Pins=2, Packaging=TapeandReel, Power Rating=75mW, Radiation Hardening=No, RoHSCompliant=True, Viewing Angle=130degrees, Wavelength=639nm, Width=1.25mm
D4: library part CMP-00227-00050034-1, "SMBJ30A SMBJ Series 48.4 V 0.6 kW Surface Mount Uni-Directional TVS Diode - DO-214AA", Breakdown Voltage=33.3V, Case/Package=SMB, Clamping Voltage=48.4V, Current=62A, Leakage Current=1µA, Manufacturer Package Identifier="DO-214AA (SMB J-Bend)", Max Breakdown Voltage=36.8V, Max Junction Temperature (Tj)=150°C, Max Power Dissipation=5W, Max Surge Current=12.4A, Min Operating Temperature=-65°C, Operating Supply Voltage=30V, Peak Pulse Power=600W, Power Line Protection=No, Test Current=1mA, Composition=Zener, Direction=Unidirectional, Element Configuration=Single, Height=2.237mm, Lead Free="Lead Free", Length=4.57mm, Lifecycle Status=Production, Max Operating Temperature=150°C, Max Reverse Leakage Current=1µA, Min Breakdown Voltage=33.3V, Mount="Surface Mount", NexarPartId=50034, Number of Channels=1, Number of Elements=1, Number of Pins=2, Number of Unidirectional Channels=1, Packaging="Tape & Reel", Peak Pulse Current=12.4A, Polarity=Unidirectional, Power Dissipation=600W, Power Rating=600W, Radiation Hardening=No, REACH SVHC="No SVHC", Reverse Breakdown Voltage=33.3V, Reverse Standoff Voltage=30V, Reverse Voltage=30V, RoHS=Compliant, Schedule B="8541100080, 8541100080", Termination=SMD/SMT, Voltage=30V, Voltage Rating (DC)=30V, Width=3.94mm
F1: library part CMP-005-00016-1, "Polymeric PTC Resettable Fuse 24V 1.5 A Ih Surface Mount 1812 (4532 Metric), Concave", Case/Package="1812 Bourns", Check_prices=https://www.snapeda.com/parts/MF-MSMF150/24X-2/Bourns/view-part/?ref=eda, Component Type=Standard, Design Item ID=MF-MSMF150/24X-2, Digi-Key_Part_Number=MF-MSMF150/24X-2TR-ND, MF=Bourns, MP=MF-MSMF150/24X-2, Pins=2, Purchase-URL=https://pricing.snapeda.com/search/part/MF-MSMF150/24X-2/?ref=eda, SnapEDA_Link=https://www.snapeda.com/parts/MF-MSMF150/24X-2/Bourns/view-part/?ref=snap, Source=MF-MSMF150_24X-2.SchLib
J1 J2: library part CMP-1502-02456-3, "Tb, Wire To Brd, R/A, 2Way, 18Awg Rohs Compliant: Yes", Current Rating=6A, Max Operating Temperature=105°C, Min Operating Temperature=-40°C, Voltage Rating=150V, Contact Material=Tin, Height=8.7mm, Number of Contacts=2, Number of Rows=1, RoHS=Compliant
J3: library part CMP-028-000000-1, "Description", Manufacturer_Name=Sullins, Copyright="Copyright (C) 2025 Ultra Librarian. All rights reserved.", Design Item ID=PRPC006SAAN-RC, Manufacturer_Part_Number=PRPC006SAAN-RC, RefDes=RefDes, Source=PRPC006SAAN-RC.SchLib, Type="Headers, Male Pins"
L1: library part CMP-1353-00074-7, "General Purpose Inductor, 10uH, 20%, 1 Element, Powdered Iron-Core, SMD, 2926", Ambient Temperature Range High=85°C, Ambient Temperature Range Low=-40°C, Case/Package=Nonstandard, Current Rating=3.2A, DC Resistance (DCR)=65mΩ, Frequency=12MHz, Inductance=10µH, Inductance Tolerance=20%, Max Operating Temperature=125°C, Saturation Current=5.6A, Series Resistance=69mΩ, Test Frequency=100kHz, Composition=Wirewound, Core Material="Composite, Ferrite", Depth=6.6mm, Height=4.8mm, Height - Seated (Max)=5.0038mm, Lead Free="Lead Free", Length=7.3mm, Max DC Current=3.2A, Min Operating Temperature=-40°C, Mount="Surface Mount", REACH SVHC=Unknown, RMS Current (Irms)=3.2A, RoHS=Compliant, Self Resonant Frequency=12MHz, Shielding=Shielded, Termination=SMD/SMT, Tolerance=20%, Width=6.6mm
Q1: library part CMP-04962-000004-1, "MOSFET N-CH 60V 100A 8SON", Continuous Drain Current=15A, Drain To Source Breakdown Voltage=60V, Drain To Source Resistance=5.7mΩ, Gate To Source Voltage=20V, Input Capacitace At Vds="1150pF @ 30V", Manufacturer="Texas Instruments", Max Forward Diode Voltage=1V, Max Junction Temp=+150°C, Package=DQJ0008A, Power Dissipation=3.2W, Temperature="-55°C to +150°C", Temperature Range Low=-55°C, Typ Forward Diode Voltage=0.8V, Automotive=No, Category=Trans, ComponentLink2Description=Datasheet, ComponentLink2URL=http://www.ti.com/lit/ds/symlink/csd18563q5a.pdf, Device Class L1="Discrete Semiconductors", Device Class L2=Transistors, Device Class L3=MOSFETs, Digikey Description="MOSFET N-CH 60V 100A 8SON", Drain To Source Voltage=60V, Gate Charge At Vgs="15nC @ 10V", Height=1.1mm, Lead Free=Yes, Manufacturer Part Number=CSD18563Q5A, Mouser Description="MOSFET 60V N-Channel NexFET Power MOSFET", Number of Channels=1, Number Of N Channels=1, Octopart=https://octopart.com/csd18563q5a-texas+instruments-30331677, Reverse Recovery Charge=63nC, Reverse Recovery Time=49ns, RoHS=TRUE, Rthja Max=50°C/W, Temperature Range High=+150°C, Threshold Vgs Max=2.4V, Threshold Vgs Min=1.7V, Transconductance=60S, Turn Off Delay Time=11.4ns, Turn On Delay Time=3.2ns
Q2: library part CMP-04962-000084-1, "MOSFET N-CH 60V 100A 8VSON", Continuous Drain Current (ID)=100A, Drain to Source Voltage (Vdss)=60V, Gate to Source Voltage (Vgs)=20V, Input Capacitance=3.84nF, Max Operating Temperature=150°C, Max Power Dissipation=3.1W, Min Operating Temperature=-55°C, Resistance=0.0035R, Contact Plating=Tin, Element Configuration=Single, Fall Time=2.7ns, Lead Free="Contains Lead", Mount="Surface Mount", Number of Pins=8, Packaging="Tape and Reel", Rds On Max=4.6mR, Rise Time=7.8ns, RoHS Compliant=Yes, Turn-Off Delay Time=20ns, Turn-On Delay Time=4.4ns
Rboot Rsnub: library part CMP-03412-037810-1, "RES SMD 2.2 OHM 1% 1/10W 0603", Case Code (Imperial)=0603, Case Code (Metric)=1608, Max Operating Temperature=155°C, Max Power Dissipation=100mW, Min Operating Temperature=-55°C, Package Quantity=1, Resistance=2.2R, Resistance Tolerance=1%, Resistor Type="Thick Film", Temperature Coefficient=200ppm/°C, Voltage Rating=50V, Case/Package=0603, Depth=0.8mm, Features="Moisture Resistant", Height=0.022inch, Lead Free="Lead Free", Length=0.063inch, Number of Pins=2, Number of Terminations=2, Packaging="Tape and Reel", Power Rating=100mW, REACH SVHC="No SVHC", RoHS Compliant=Yes, Series=RC, Size Code=0603, Technology="THICK FILM", Termination=SMD/SMT, Tolerance=1%, Voltage Rating (DC)=50V, Width=0.031inch
Rc1: library part CMP-1659-00032-1, "Chip Resistor, 15 KOhm, +/- 1%, 0.1 W, -55 to 155 degC, 0603 (1608 Metric), RoHS, Tape and Reel", ComponentLink1Description="Manufacturer URL", ComponentLink1URL=http://www.yageo.com/, ComponentLink2Description=Datasheet, ComponentLink2URL=http://www.yageo.com/documents/recent/PYu-RC_Group_51_RoHS_L_04.pdf, DatasheetVersion="Rev. 4, 02/2016", PackageDescription="2-Pin Surface Mount Device, Body 1.6 x 0.8 mm", PackageReference=0603, RoHSCompliant=true
Rc2: library part CMP-2100-03663-2, Case Code (Imperial)=0603, Max Operating Temperature=155°C, Min Operating Temperature=-55°C, Power Rating=100mW, Resistance=100Ω, Temperature Coefficient=100ppm/°C, Tolerance=1%, Voltage Rating=50V, Case Code (Metric)=0603, Case/Package=0603, Composition="Thick Film", Depth=800µm, Height=450µm, Lead Free="Lead Free", Length=1.6mm, Military Standard=Not, NexarPartId=55402879, Number of Pins=2, Packaging="Tape & Reel", REACH SVHC=Unknown, RoHS=Compliant, Schedule B="8533210045, 8533210045", Termination=SMD/SMT, Voltage Rating (DC)=50V, Width=800µm
RFB1: library part CMP-1012-00705-2, Manufacturer=Yageo, Part Number=RC0603FR-0752K3L
RFB2 RLED2: library part CMP-2100-03664-2, "RES 10K OHM 1% 1/10W 0603", Case Code (Imperial)=0603, Case Code (Metric)=1608, Max Operating Temperature=155°C, Max Power Dissipation=100mW, Min Operating Temperature=-55°C, Resistance=10kR, Resistance Tolerance=1%, Resistor Type="Thick Film", Temperature Coefficient=100ppm/°C, Voltage Rating=75V, Voltage Rating (DC)=50V, Case/Package=0603, Construction=Rectangular, Depth=0.8mm, Features="Moisture Resistant", Height=0.45mm, Lead Free="Lead Free", Lead Pitch=0.3mm, Length=1.6mm, Military Standard=Not, Number of Pins=2, Number of Terminations=2, Packaging="Tape and Reel", Power Rating=100mW, RoHS Compliant=Yes, Series=RC, Size Code=0603, Termination=SMD/SMT, Tolerance=1%, Weight=7.1E-05oz, Width=0.8mm
Rilim: library part CMP-2000-04904-1, Manufacturer=Yageo, Part Number=RC0603FR-07147RL
RLED1: library part CMP-1659-00009-5, "RES 1K OHM 1% 1/10W 0603", Case Code (Imperial)=0603, Case Code (Metric)=1608, Max Operating Temperature=155°C, Max Power Dissipation=100mW, Min Operating Temperature=-55°C, Resistance=1kR, Resistance Tolerance=1%, Resistor Type="Thick Film", Temperature Coefficient=100ppm/°C, Voltage Rating=50V, Case/Package=0603, Construction=Rectangular, Contact Plating=Tin, Depth=0.8mm, Features="Moisture Resistant", Height=0.45mm, Lead Free="Lead Free", Length=1.6mm, Military Standard=Not, Number of Terminations=2, Packaging="Tape and Reel", Power Rating=100mW, Radiation Hardening=No, REACH SVHC="No SVHC", RoHS Compliant=Yes, Series=RC, Size Code=0603, Technology="THICK FILM", Termination=SMD/SMT, Tolerance=1%
Rpgood Ruv1: library part CMP-2100-03662-2, "RES SMD 100K OHM 1% 1/10W 0603", Case Code (Imperial)=0603, Case Code (Metric)=1608, Max Operating Temperature=155°C, Max Power Dissipation=100mW, Min Operating Temperature=-55°C, Resistance=100kR, Resistance Tolerance=1%, Resistor Type="Thick Film", Temperature Coefficient=100ppm/°C, Voltage Rating=50V, Working Voltage=75V, Case/Package=0603, Construction=Rectangular, Depth=0.8mm, Features="Moisture Resistant", Height=0.45mm, Lead Free="Lead Free", Length=1.6mm, Military Standard=Not, Number of Pins=2, Number of Terminations=2, Packaging="Tape and Reel", Power Rating=100mW, REACH SVHC="No SVHC", RoHS Compliant=Yes, Series=RC, Technology="THICK FILM", Termination=SMD/SMT, Tolerance=1%, Voltage Rating (DC)=50V, Width=0.8mm
RT: library part CMP-2000-06932-2, "RES 20K OHM 1% 1/10W 0603", Case Code (Imperial)=0603, Case Code (Metric)=1608, Max Operating Temperature=155°C, Max Power Dissipation=100mW, Min Operating Temperature=-55°C, Package Quantity=1, Resistance=20kR, Resistance Tolerance=1%, Resistor Type="Thick Film", Temperature Coefficient=100ppm/°C, Voltage Rating=50V, Case/Package=0603, Construction=Rectangular, Depth=0.8mm, Features="Moisture Resistant", Height=0.022inch, Lead Free="Lead Free", Length=0.063inch, Military Standard=Not, Number of Pins=2, Number of Terminations=2, Packaging="Tape and Reel", Power Rating=100mW, REACH SVHC="No SVHC", RoHS Compliant=Yes, Series=RC, Size Code=0603, Technology="THICK FILM", Termination=SMD/SMT, Tolerance=1%, Voltage Rating (DC)=50V, Width=0.031inch
Ruv2: library part CMP-009-00179-1, "No Description Available", Manufacturer_Name=Yageo, Copyright="Copyright (C) 2026 Ultra Librarian. All rights reserved.", Design Item ID=RC0603FR-0717K8L, Manufacturer_Part_Number=RC0603FR-0717K8L, Source=RC0603FR-0717K8L.SchLib
"Rvin Filter": library part CMP-1012-00247-1, "4R7 0.1W 1% 0603 (1608 Metric)  SMD", Case-EIA=0603, Case-Metric=1608, Power="0.1 W", Tolerance="1 %", Technology=SMT
TP1 TP2 TP3 TP4: library part CMP-2000-05183-2, "PC TEST POINT MINIATURE", Manufacturer=keystone, Automotive=No, Category=Conn, ComponentLink2Description=Datasheet, ComponentLink2URL=http://www.keyelco.com/product-pdf.cfm?p=1353, Conn Orientation=Straight, Contact Material=Silver, Device Class L1=Connectors, Device Class L2=unset, Device Class L3=unset, Digikey Description="PC TEST POINT MINIATURE", Height=1.65mm, Lead Free=Yes, Manufacturer Part Number=5015, Number of Contacts=1, Octopart=https://octopart.com/5015-keystone-3822, Package=5015, RoHS=TRUE
U1: library part CMP-00024-00006-1, "LM5145 Buck Tape & Reel (TR) e3 DC to DC switching controller 1mm 75V 100kHz~1MHz -40C~125C TJ", Case/Package=VQFN, Max Operating Temperature=125°C, Min Operating Temperature=-40°C, Nominal Supply Current=1.8mA, Pins=20

## Free pads (board coordinates)
  round 240 hole 126: MH(1575,1150) MH(1575,2875) MH(3800,1375) MH(3800,2725)

## Via types
v1: diameter 50, hole 28, Top Layer to Bottom Layer, 27 vias
v2: diameter 19.68, hole 7.87, Top Layer to Bottom Layer, 4 vias
v3: diameter 15, hole 7, Top Layer to Bottom Layer, 3 vias
v4: diameter 25, hole 15, Top Layer to Bottom Layer, 2 vias
v5: diameter 25, hole 13, Top Layer to Bottom Layer, 1 vias
v6: diameter 25, hole 14, Top Layer to Bottom Layer, 1 vias
v7: diameter 30, hole 15, Top Layer to Bottom Layer, 1 vias
v8: diameter 40, hole 22, Top Layer to Bottom Layer, 1 vias
v9: diameter 20, hole 11, Top Layer to Bottom Layer, 1 vias

## Nets (pads, with @x,y where several pads share a name; then routed paths per layer and width w, separated by ;. In a path a pad name is that pad's centre, name@x,y a point inside that pad or via, vN(x,y) a via of type N, cw(c..) or ccw(c..) an arc to the next point about the centre after c; other vN are vias at no path point)
NetCboot_1: Cboot.1 Rboot.2 | length 123
  Top Layer w10: Rboot.2 3247.89,1792.62 3262.49,1778.03 3307.73,1778.03 Cboot.1
NetCboot_2: Cboot.2 L1.1 Q1.1 Q1.2 Q1.3 Q2.5-6-7-8 Rilim.2 Rsnub.1 TP3.1 U1.19 | length 4688.3
  Top Layer w10: v1(1820.86,1394.16) 1820.86,1470.86 TP3.1 ; Rsnub.1 2765.48,2115.48 2825,2175 3068.08,2175 3073.94,2180.86 3073.94,2291.51 3087.27,2304.85 v1(3087.27,2315.67) ; Q2.5-6-7-8 Q2.5-6-7-8@2958.25,2316.71 ; v9(2978.4,1539.01) 2978.56,1539.17 3022.88,1539.17 Rilim.2 ; U1.19 3042.17,1809.25 3080.22,1847.31 3309.02,1847.31 Cboot.2 ; v1(3075,2475) 3075,2433.46 3066.54,2425 ; Q1.3 3140.16,2325 3131.87,2316.71 3126.01,2316.71 3093.32,2316.71 3087.27,2316.71 Q2.5-6-7-8@2958.25,2316.71 ; Q1.2 3116.54,2375 3066.54,2425 ; Q1.1 3066.54,2425 ; v1(3167.64,2202.94) 3315.45,2055.12 Cboot.2 ; v1(3394.36,1689.49) 3394.36,1762.96 3316.44,1840.87 Cboot.2 ; v1(3455.27,2427.01) 3462.93,2419.36 3474,2419.36 3564.95,2328.41 L1.1 ; Q2.5-6-7-8@2958.25,2316.71 3066.54,2425
  GND w10: v1(1820.86,1394.16) 1824.37,1394.16 1897.16,1321.38 2357.5,1321.38 2452.29,1416.17 2824.23,1416.17 2884.7,1476.63 2916.02,1476.63 v9(2978.4,1539.01) 2978.4,1507.86 2984.26,1502 3078.74,1502 3266.22,1689.49 v1(3394.36,1689.49) ; v1(3075,2475) 3407.29,2475 v1(3455.27,2427.01) ; v1(3087.27,2315.67) 3087.27,2231.18 3119.48,2198.98 3163.68,2198.98 v1(3167.64,2202.94)
NetCc1_1: Cc1.1 Rc1.2 | length 49.8
  Top Layer w10: Cc1.1 Rc1.2
NetCc1_2: Cc1.2 Cc2.2 J3.5 Rc2.1 RFB1.2 RFB2.1 U1.5 | length 1094.2
  Top Layer w10: J3.5 2304.31,1870.69 2379.17,1870.69 2524.96,1724.91 Cc2.2 ; Cc1.2 2605.86,1775 2600,1769.14 2600,1729.77 Cc2.2 ; RFB2.1 2786.47,1590.59 2795.29,1599.41 2822.64,1599.41 ; Rc2.1@2846.18,1710.75 2835.43,1700 Rc2.1 ; Rc2.1@2846.18,1710.78 2885.52,1750.12 U1.5@2898.7,1750.12 ; RFB1.2 2822.64,1599.41 ; Cc2.2 2595.27,1724.78 2595.27,1694.92 2601.12,1689.06 2678.06,1689.06 2683.92,1694.92 2683.92,1718.77 2693.95,1728.8 2827.61,1728.8 2833.46,1722.94 Rc2.1 ; 2822.64,1599.41 2822.64,1689.25 2833.39,1700 Rc2.1
NetCc2_1: Cc2.1 Rc1.1 U1.4 | length 309.6
  Top Layer w10: Cc2.1 2648.28,1726.88 2666.11,1744.71 2856.24,1744.71 2880.61,1769.08 2880.61,1769.8 ; Rc1.1 2855.79,1769.8 2880.61,1769.8 ; U1.4 2905.43,1769.8 2880.61,1769.8
NetCc3_1: Cc3.1 Rc2.2 | length 118.5
  Top Layer w10: Cc3.1 2667.45,1657.93 2681.15,1671.63 2688.99,1671.63 2703.11,1685.76 2750.33,1685.76 2764.57,1700 Rc2.2
NetCc3_2: "Cout Bulk.2" "Cout Ceram 2.1" "Cout Ceram.1" Cc3.2 J2.1 J3.2 L1.2 RFB1.1 Rpgood.1 TP2.1 | length 3768.6
  Top Layer w10: TP2.1 2051.81,1648.19 2153.77,1648.19 2226.97,1575 J3.2 2300.25,1574.75 2390.58,1574.75 2447.16,1631.33 2586.12,1631.33 ; Cc3.2 2610.37,1654 2587.7,1631.33 2586.12,1631.33 ; RFB1.1 2853.94,1650.59 2876.67,1627.86 2876.67,1559.42 ; 3860.43,1840.1 3850.66,1830.34 3810.41,1830.34 3808.39,1828.31 3752.48,1828.31 ; 3862.15,2016.45 3764.19,2016.45 3758.33,2010.59 3758.33,1834.17 3752.48,1828.31 ; J2.1 3886.88,2317.58 L1.2 3779.52,2158.91 3760.21,2139.6 3760.21,2088.43 3754.35,2082.57 3631.52,2082.57 3625.97,2088.12 3422.17,2088.12 3416.31,2082.26 3416.31,1870.07 3458.07,1828.31 ; 2586.12,1631.33 2586.12,1584.57 2591.98,1578.71 2731.45,1578.71 2750.75,1559.42 2876.67,1559.42 ; 2876.67,1559.42 2898.45,1537.64 Rpgood.1 2937.19,1494.2 2946.32,1485.07 3357.82,1485.07 3385.29,1512.54 3385.29,1601.9 3458.07,1674.68 3458.07,1828.31 ; 3458.07,1828.31 3752.48,1828.31
NetCilim_1: Cilim.1 Rilim.1 U1.11 | length 197.2
  Top Layer w10: Rilim.1 3022.07,1595.4 3022.07,1614.13 3000,1636.2 U1.11 3025,1630.71 3060.32,1630.71 3098.3,1592.73 Cilim.1
NetCilim_2: Cilim.2 D2.1 | length 536.2
  Top Layer w10: D2.1 2846.22,1376.93 v1(2891.99,1422.7) ; Cilim.2 3148.21,1535.64 3162.14,1521.72 v8(3170.26,1521.72)
  GND w10: v1(2891.99,1422.7) 2892.29,1422.7 2920.43,1394.56 3043.1,1394.56 v8(3170.26,1521.72)
"NetCin Bulk_1": "Cin Bulk.1" "Cin Ceram 2.1" "Cin Ceram.1" "Cin HF.1" "Rvin Filter.1" D1.3 D4.1 J3.1 Q1.5-6-7-8 RLED2.1 Ruv1.1 TP1.1 | length 4608.3
  Top Layer w10: RLED2.1 2071.72,2221.72 v1(2025,2175) 2025,1850 TP1.1 1824.91,1649.91 1824.91,1573.18 1830.77,1567.33 2168.25,1567.33 2260.58,1475 J3.1 ; v1(2100,2550) 2128.74,2521.26 D4.1 2378.74,2521.26 2498.43,2640.94 D1.3 2501.57,2640.94 2642.91,2499.61 2825,2499.61 2995.87,2499.61 3031.3,2535.04 3050,2535.04 3068.7,2535.04 3093.7,2560.04 3200,2560.04 3200,2513.81 3205.86,2507.95 3324.63,2507.95 3324.63,2419.48 3263.78,2358.63 Q1.5-6-7-8 3265.16,2351.38 3423.62,2351.38 v1(3425,2350) ; Ruv1.1 v1(2900,2102.35) ; 3147.43,1899.81 3149.02,1901.39 v1(3224.6,1901.39)
  GND w10: v1(2900,2102.35) 2902.35,2102.35 2952.48,2152.48 3142.27,2152.48 3231.45,2063.31 3231.45,1908.24 v1(3224.6,1901.39) ; 3145.75,2150 3325,2150 3425,2250 v1(3425,2350)
  Bottom Layer w10: v1(2025,2175) 2025,2325 2100,2400 v1(2100,2550)
NetCsnub_1: Csnub.1 Rsnub.2 | length 134.6
  Top Layer w10: Csnub.1 2675,2235.43 2725,2185.43 Rsnub.2
NetCSS_1: CSS.1 U1.3 | length 123.3
  Top Layer w10: CSS.1 2826.08,1843.7 2880.13,1789.65 2905.43,1789.65 U1.3
"NetCvcc Bulk_1": "Cvcc Bulk.1" "Cvcc HF.1" U1.8 U1.14 | length 785.5
  Top Layer w10: v3(2873.47,1677.86) 2874.83,1677.86 2888.03,1691.06 2905.43,1691.06 U1.8 ; U1.14 3142.83,1710.83 v1(3170.49,1683.17) ; 3250.06,1655.51 3222.4,1683.17 v1(3170.49,1683.17) ; 3254.1,1571.44 3254.1,1572.42 3175.2,1651.32 3175.2,1678.45 v1(3170.49,1683.17)
  GND w10: v3(2873.47,1677.86) 2873.47,1643.85 2893.73,1623.59 3110.91,1623.59 v1(3170.49,1683.17)
"NetCvin Filter_1": "Cvin Filter.1" "Rvin Filter.2" U1.20 | length 251.2
  Top Layer w10: U1.20 2999.92,1825.08 2999.92,1848.83 2999.9,1858.86 3040.84,1899.81 3076.57,1899.81 3148.56,1971.8 3151.16,1971.8 3164.11,1984.76 3164.11,1985.68
NetD1_1: D1.1 F1.2 | length 631.3
  Top Layer w10: F1.2 1957.87,2499.81 1996.35,2499.81 2046.16,2450 2519.14,2450 2525,2455.86 2525,2477.76 D1.1@2538.39,2491.14
NetD2_2: D2.2 RLED1.2 | length 78.5
  Top Layer w10: D2.2 2710.37,1415.55 2715.39,1420.57 2715.39,1442.03 RLED1.2
NetD3_1: D3.1 RLED2.2 | length 312.8
  Top Layer w10: D3.1 1858.66,2216.34 1875,2200 1954.01,2200 2029.01,2275 RLED2.2
NetF1_1: F1.1 J1.1 | length 238.5
  Top Layer w10: F1.1 1792.32,2533.46 1825,2566.14 J1.1
NetJ3_3: J3.3 RLED1.1 Rpgood.2 U1.10 | length 937.7
  Top Layer w10: J3.3 2307.04,1667.96 2398.94,1667.96 v1(2405.97,1660.93) ; RLED1.1 2814.15,1450 2837.87,1473.72 v6(2837.87,1475.49) ; v3(2900,1602.32) 2901.36,1602.32 2903.61,1604.57 Rpgood.2 2940.94,1608.33 U1.10
  GND w10: v1(2405.97,1660.93) 2569.73,1497.18 2816.18,1497.18 v6(2837.87,1475.49) 2839.63,1475.49 2900,1535.86 v3(2900,1602.32)
NetJ3_4: J3.4 Ruv1.2 Ruv2.1 U1.1 | length 985
  Top Layer w10: J3.4 2300.23,1775.23 2408.7,1775.23 v1(2408.93,1775.46) ; v1(2487.1,1834.24) 2629.05,1976.19 2836.66,1976.19 2871.31,1941.54 Ruv1.2 2900,1872.68 U1.1@2940.94,1831.73 ; U1.1 U1.1@2940.94,1831.73 ; Ruv2.1@2991.9,1964.46 2968.88,1941.44 2968.88,1906.28 2940.94,1878.34 U1.1@2940.94,1831.73
  GND w10: v1(2408.93,1775.46) 2412.13,1775.46 2438.82,1802.14 2455,1802.14 v1(2487.1,1834.24)
NetQ1_4: Q1.4 U1.18 | length 559.1
  Top Layer w10: U1.18 3061.27,1789.57 3069.72,1798.02 v4(3073.78,1798.02) ; v4(3060.09,1976.59) 3060.09,1979.29 3090.7,2009.9 3090.7,2225.54 3140.16,2275 Q1.4
  GND w10: v4(3060.09,1976.59) 3060.09,1972.53 3073.78,1958.84 v4(3073.78,1798.02)
NetQ2_4: Q2.4 U1.13 | length 999.4
  Top Layer w10: v1(2744.32,2280.94) 2774.68,2250.58 2789.58,2250.58 2815.16,2225 Q2.4 ; U1.13 3068.53,1691.14 3085.04,1674.62 v1(3095.87,1674.62)
  GND w10: v1(2744.32,2280.94) 2780.42,2244.84 2780.42,2168.8 2882.78,2066.44 3023.48,2066.44 3098.61,1991.31 3098.61,1677.37 v1(3095.87,1674.62)
NetRboot_1: Rboot.1 U1.17 | length 106.7
  Top Layer w10: U1.17 3078.74,1769.88 3086.56,1777.7 3117.75,1777.7 Rboot.1
NetRT_1: RT.1 U1.2 | length 183.4
  Top Layer w10: RT.1@2803.28,1918.7 2845.22,1918.7 2851.08,1912.84 2851.08,1858.47 2893.48,1816.06 2898.7,1816.06 2898.7,1809.33 2898.78,1809.25 U1.2
PGND: "Cin Bulk.2" "Cin Ceram 2.2" "Cin Ceram.2" "Cin HF.2" "Cout Bulk.1" "Cout Ceram 2.2" "Cout Ceram.2" "Cvcc Bulk.2" "Cvcc HF.2" "Cvin Filter.2" Csnub.2 CSS.2 D3.2 D4.2 J1.2 J2.2 J3.6 pad.MH Q2.1 Q2.2 Q2.3 RFB2.2 RT.2 Ruv2.2 TP4.1 U1.6 U1.12 U1.15 U1.21 | length 7738.6
  Top Layer w10: D3.2 1941.34,2316.34 v1(2000,2375) 2010.82,2375 2022.52,2363.31 2663.27,2363.31 Csnub.2 2726.57,2351.57 ; v1(2049.97,1394.68) TP4.1 ; v1(2050,2650) 2000,2650 J1.2 2187.99,2725 2234.25,2678.74 D4.2 ; D4.2@2265.75,2678.74 2362.01,2775 2750.39,2775 2825,2700.39 2995.87,2700.39 3031.3,2664.96 3050,2664.96 3156.3,2664.96 3181.3,2689.96 3200,2689.96 3218.7,2689.96 3292.35,2763.61 3292.35,2792.35 v1(3300,2800) 3300,2793.43 3325,2768.43 3325,2565.54 3324.63,2565.17 ; v1(2725,2400) 2750,2375 ; v5(2726.8,1636.94) 2730.86,1636.94 2737.79,1643.87 RFB2.2 ; CSS.2 2747.53,1845.67 2733.83,1859.37 2731.86,1859.37 2699.41,1891.83 v1(2655.92,1891.83) 2689.1,1925 RT.2 ; Q2.3 2815.16,2275 2738.58,2351.57 ; Q2.2 2815.16,2325 2788.58,2351.57 2738.58,2351.57 ; Q2.1 2750,2375 ; v3(2871,1704.58) 2871.96,1705.54 2871.96,1714.06 2888.41,1730.51 U1.6 ; Ruv2.2 2992.97,2024.53 3039.39,2070.95 3039.39,2093.35 v1(3047.04,2101) ; U1.12 3048.26,1671.46 3081,1638.72 3165.31,1638.72 3177.02,1627.01 3177.02,1561.75 3204.53,1534.24 3204.53,1518.74 3210.38,1512.88 3356.73,1512.88 3362.59,1518.74 3362.59,1601.05 3311.08,1652.55 3311.08,1573.3 3309.22,1571.44 ; U1.15 3035.51,1730.59 3168.33,1730.59 v7(3169.25,1731.51) ; v1(3130.67,2108.58) 3164.11,2075.13 3164.11,2042.9 ; v1(3460.78,1910) 3621.08,1910 3625.97,1914.89 3625.97,1942.45 3652.47,1968.95 3673.46,1968.95 3790.97,2086.46 3790.97,2130.67 3796.83,2136.53 3862.15,2136.53 3927.03,2136.53 3932.89,2130.67 ; 3860.43,1960.18 3862.51,1958.1 3927.03,1958.1 3932.89,1963.96 3932.89,2130.67 ; J2.2 3932.89,2263.6 3932.89,2130.67 ; 2726.57,2351.57 2738.58,2351.57 ; 2726.57,2351.57 2750,2375
  GND w10: v1(2000,2375) 2050,2425 v1(2050,2650) ; v1(2655.92,1891.83) 2654.49,1890.39 2654.49,1776.7 2726.8,1704.39 v5(2726.8,1636.94) 2799.76,1709.9 2832.04,1709.9 2837.36,1704.58 v3(2871,1704.58) ; v1@2725.33,2399.67 v1(2725,2400) 3125,2800 v1(3300,2800) ; v1(3047.04,2101) 3050.83,2104.79 3126.88,2104.79 v1(3130.67,2108.58) ; v7(3169.25,1731.51) 3366,1731.51 3387.3,1752.81 3387.3,1836.52 v1(3460.78,1910)
  other v2: 2970.47,1697.05 2946.85,1740.35 2994.09,1740.35 2970.47,1783.66
pads on no net: D1.2 U1.7 U1.9 U1.16

## Polygon pours and split planes (outlines as drawn)
PGND on GND "PGND - Plane" (solid, remove dead copper, pour order 0): 1375,3050 1375,950 3750,950 4175,1375 4175,2725 3850,3050

## Silkscreen, mask and mechanical layers (free items; w line width, h text height)
Top Overlay:
  lines w2: 1891.19,2088.12 1891.19,2137.91 ; 2205.34,2446.63 2248.42,2446.63 2271.69,2423.37 2224.29,2423.37 2248.42,2447.49 ; 2247.56,2446.63 2291.51,2446.63 ; 2464.99,2446.63 2508.07,2446.63 2531.34,2423.37 2483.94,2423.37 2508.07,2447.49 ; 2507.21,2446.63 2551.15,2446.63 ; 2756.36,1271.95 2756.36,1306.59 ; 2248.42,2447.49 2248.42,2447.49 ; 2508.07,2447.49 2508.07,2447.49 ; 1892.88,2115.97 1894.57,2115.97 1913.97,2135.38 1913.97,2094.88 1892.88,2115.97 ; 2744.13,1276.43 2756.36,1288.66 2756.36,1289.88 2744.13,1302.11 2744.13,1276.43
  text "+" at 2872.12,2428.7 h10
  text "+" at 3579.02,2127.49 h10
  text "1" at 2955.26,1851.07 h10
  text "24V -> 5V SYNCHRONOUS BUCK CONVERTER / 3A  |  500kHz  |  LM5145 / DESIGNER: CONNOR CARLISLE / 2026-08-15        REV A" at 3210.76,1036.28 h25

## Text inside footprints (layer, text, board x,y; h text height)
J3: Top Overlay "REFDES" at 2325,1637.5 h50 r90; Top Overlay "RefDes" at 2325,1650 h50 r90; Mechanical 13 "RefDes2" at 2325,1637.5 h50 r90